# EAGLE board Main (EAGLE 9.6.2)
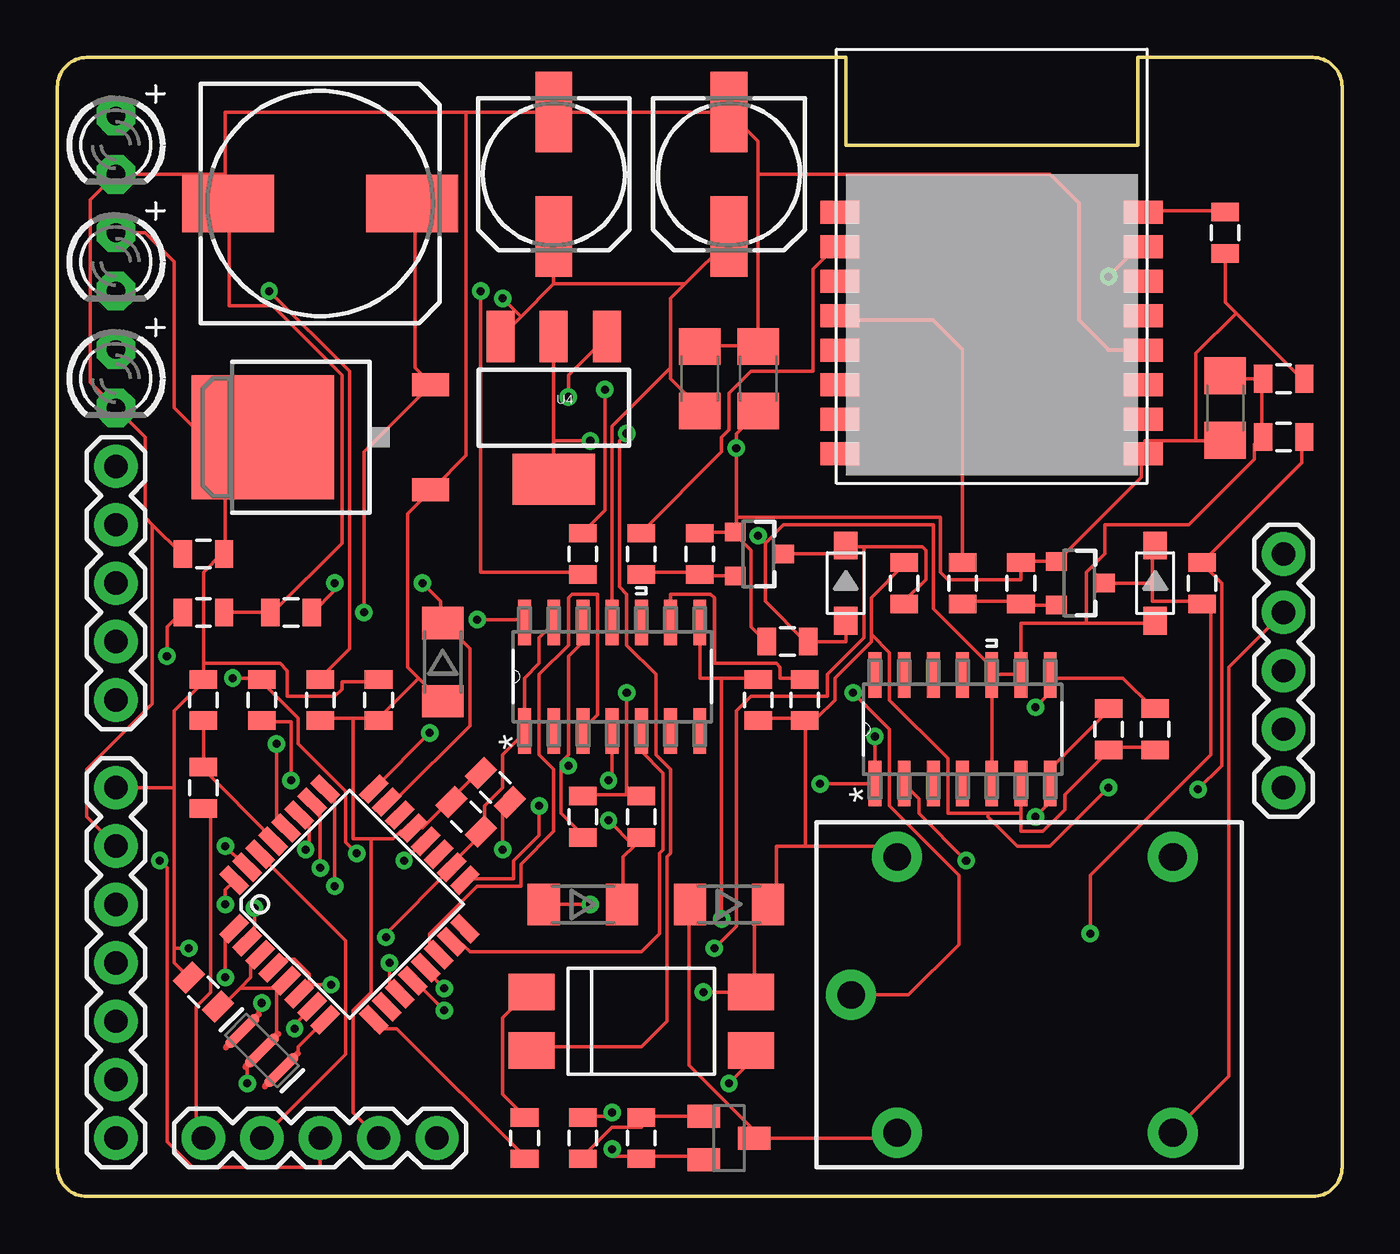
[diagram p0: board, top side]
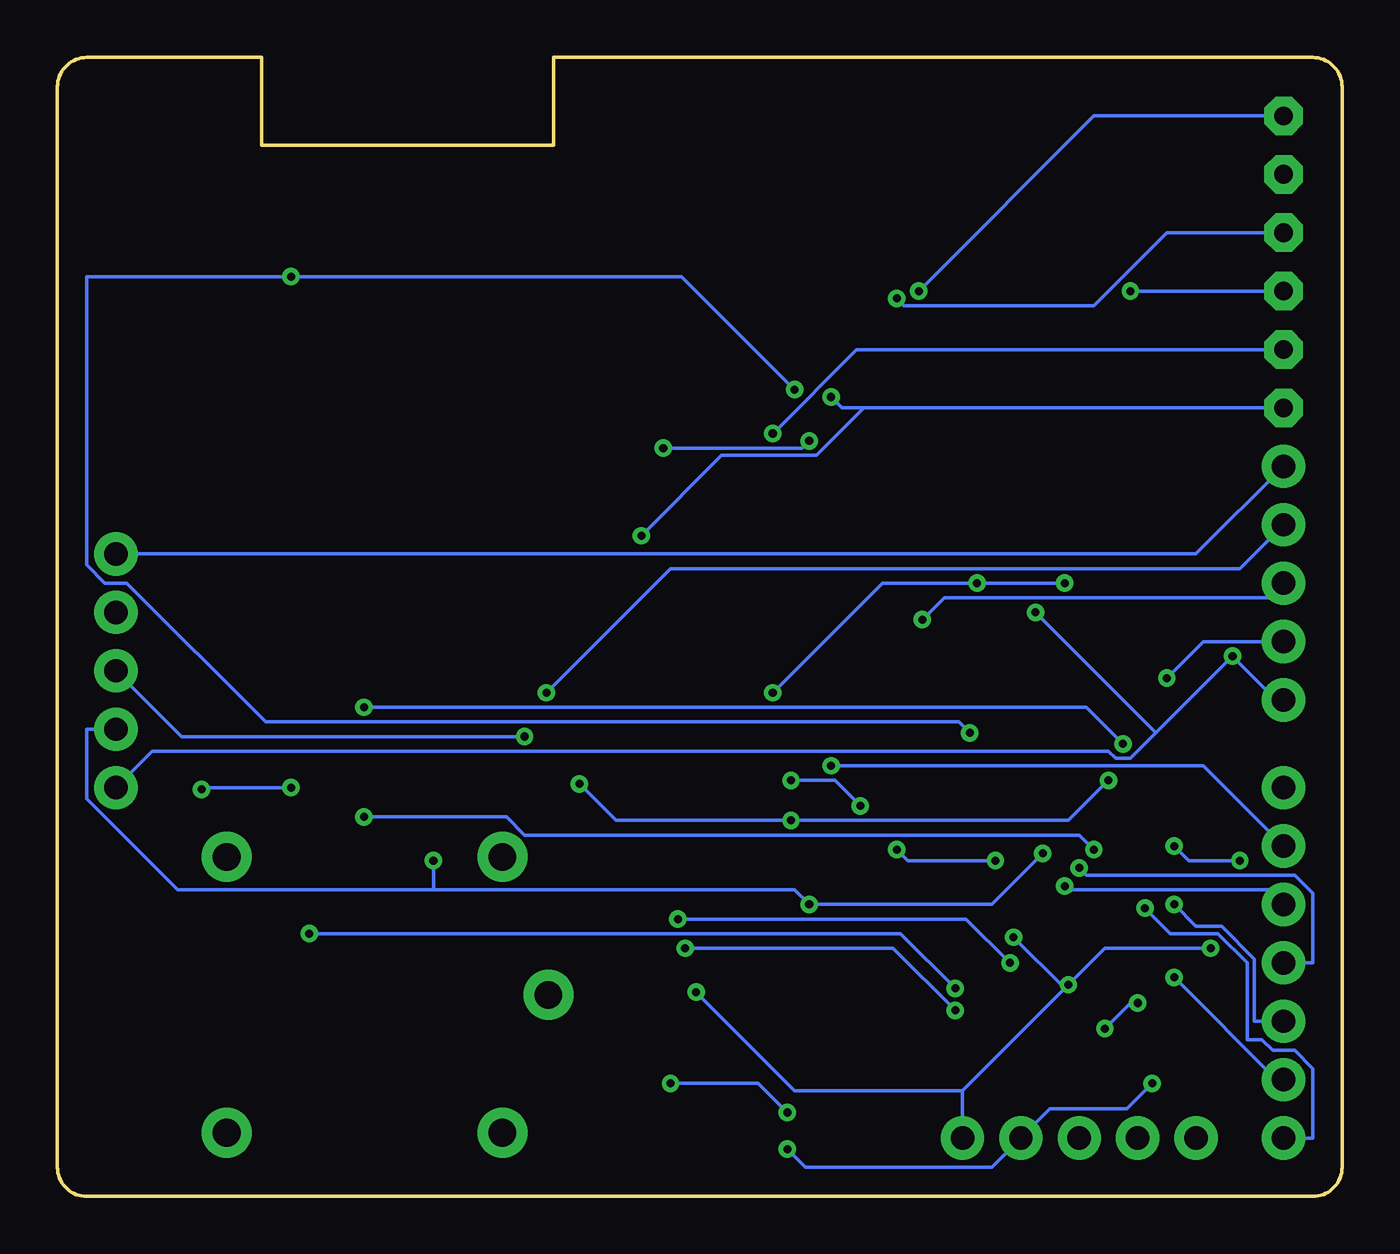
[diagram p1: board, bottom side, seen from below]

Size 55.88 x 49.53 mm. Coordinates in mm from the lower left corner, seen from the top.
Outline: 0,1.27 0,48.26 arc-90 1.27,49.53 34.29,49.53 34.29,45.72 46.99,45.72 46.99,49.53 54.61,49.53 arc-90 55.88,48.26 55.88,1.27 arc-90 54.61,0 1.27,0 arc-90 0,1.27
Copper layers (1*16): Top 0.035mm / dielectric 1.5mm / Bottom 0.035mm
Design rules "default": minimum track width 6mil, minimum drill 0.35mm, track to track 6mil, track to pad 6mil, pad to pad 6mil, via to via 6mil, smd to smd 6mil, copper to edge 40mil, drill to drill 6mil, minimum pad ring 10mil, minimum via ring 8mil, stop-mask expansion 4mil, vias tented up to drill 0mil, thermal gap 10mil
Net classes: 1 power: width 0.203 mm

## Footprints (pad centres in the part's own frame; a part is rotated, then mirrored left to right if it is on the bottom)
0805 = smd 0.8 x 1.2: 1 -0.9,0; 2 0.9,0
C1206 = smd 1.6 x 1.8: 1 -1.4,0; 2 1.4,0
153CLV-1010 = smd 4 x 2.5: + 4,0; - -4,0
153CLV-0605 = smd 3.5 x 1.6: + 2.7,0; - -2.7,0
SOD123-2.7X1.6 = smd 1.2 x 1.02: 1 -1.635,0; 2 1.635,0
SOD80 = smd 1.4 x 1.8: 1 -1.7,0; 2 1.7,0
1X05 = drill 1.016 pad 1.88: 1 0,0; 2 2.54,0; 3 5.08,0; 4 7.62,0; 5 10.16,0
TQFP32-08 = smd 1.27 x 0.559: 1 -4.293,2.8; 2 -4.293,2; 3 -4.293,1.2; 4 -4.293,0.4; 5 -4.293,-0.4; 6 -4.293,-1.2; 7 -4.293,-2; 8 -4.293,-2.8; 17 4.293,-2.8; 18 4.293,-2; 19 4.293,-1.2; 20 4.293,-0.4; 21 4.293,0.4; 22 4.293,1.2; 23 4.293,2; 24 4.293,2.8 | smd 0.559 x 1.27: 9 -2.8,-4.293; 10 -2,-4.293; 11 -1.2,-4.293; 12 -0.4,-4.293; 13 0.4,-4.293; 14 1.2,-4.293; 15 2,-4.293; 16 2.8,-4.293; 25 2.8,4.293; 26 2,4.293; 27 1.2,4.293; 28 0.4,4.293; 29 -0.4,4.293; 30 -1.2,4.293; 31 -2,4.293; 32 -2.8,4.293
TO252 = smd 1 x 1.6: 1 -2.28,-4.8; 2 2.28,-4.8 | smd 5.4 x 6.2: TAB 0,2.5
1X07 = drill 1.016 pad 1.88: 1 0,0; 2 2.54,0; 3 5.08,0; 4 7.62,0; 5 10.16,0; 6 12.7,0; 7 15.24,0
LED3MM = drill 0.813 pad 1.676 octagon: A -1.27,0; K 1.27,0
DIL4-SMD = smd 1.6 x 2: 1 -1.27,-4.77; 2 1.27,-4.77; 3 1.27,4.77; 4 -1.27,4.77
SOT23-3 = smd 0.8 x 0.9: 1 -0.95,-1; 2 0.95,-1; 3 0,1.1
SOT23-BEC = smd 1 x 1.4: B -0.95,-1.1; C 0,1.1; E 0.95,-1.1
SOIC127P600X175-14N = smd 1.981 x 0.559: 1 -2.362,3.81; 2 -2.362,2.54; 3 -2.362,1.27; 4 -2.362,0; 5 -2.362,-1.27; 6 -2.362,-2.54; 7 -2.362,-3.81; 8 2.362,-3.81; 9 2.362,-2.54; 10 2.362,-1.27; 11 2.362,0; 12 2.362,1.27; 13 2.362,2.54; 14 2.362,3.81
16P-18.5X13.5X0.8 = smd 1.7 x 1: 1 -6.6,2.15; 2 -6.6,0.65; 3 -6.6,-0.85; 4 -6.6,-2.35; 5 -6.6,-3.85; 6 -6.6,-5.35; 7 -6.6,-6.85; 8 -6.6,-8.35; 9 6.6,-8.35; 10 6.6,-6.85; 11 6.6,-5.35; 12 6.6,-3.85; 13 6.6,-2.35; 14 6.6,-0.85; 15 6.6,0.65; 16 6.6,2.15
SOT223 = smd 1.219 x 2.235: 1 -2.311,-3.099; 2 0,-3.099; 3 2.311,-3.099 | smd 3.6 x 2.2: 4 0,3.099
SRD-05VDC-SL-C = drill 1.2 pad 2.184: COIL0 -5.39,-6.12; COIL1 -5.39,5.88; SWCLOSED 6.61,-6.12; SWCOMMON -7.39,-0.12; SWOPEN 6.61,5.88
RESONATOR-SMD = smd 0.45 x 1.905: 1 -1.2,0; 2 0,0; 3 1.2,0

## Placement (x,y rotation side)
C1  0.1uF  [0805]  31.75,24.13 0 top
C2  10uF  [C1206]  50.8,34.29 90 top
C3  0.1uF  [0805]  53.34,35.56 180 top
C4  22uF  [C1206]  30.48,35.56 90 top
C5  4.7uF  [C1206]  27.94,35.56 90 top
C6  0.1uF  [0805]  17.78,16.51 315 top
C7  0.1uF  [0805]  19.05,17.78 315 top
C8  0.1uF  [0805]  6.35,17.78 90 top
C9  0.1  [0805]  53.34,33.02 180 top
C10  220/50  [153CLV-1010]  11.43,43.18 0 top
C11  100/35  [153CLV-0605]  21.59,44.45 270 top
C12  0.1uF  [0805]  6.35,25.4 0 top
C13  0.1uF  [0805]  6.35,8.89 315 top
C14  0.1uF  [0805]  6.35,27.94 180 top
C15  10uf  [153CLV-0605]  29.21,44.45 270 top
C17  0.1uF  [0805]  13.97,21.59 270 top
C18  0.1  [0805]  10.16,25.4 180 top
D1  SMF5.0A  [SOD123-2.7X1.6]  47.75,26.67 90 top
D2  SMF5.0A  [SOD123-2.7X1.6]  34.29,26.67 90 top
D3  4148  [SOD80]  16.76,23.24 270 top
D5  4148  [SOD80]  22.86,12.7 180 top
D12  4148  [SOD80]  29.21,12.7 180 top
ECU  [1X05]  2.54,21.59 90 top
IC1  MEGA8-AI  [TQFP32-08]  12.7,12.7 45 top
IC2  LM1117DTX-5.0  [TO252]  11.43,33.02 90 top
JP1  [1X07]  2.54,17.78 270 top
JP2  [1X05]  6.35,2.54 0 top
LED1  BT  [LED3MM]  2.54,45.72 270 top
LED2  PW  [LED3MM]  2.54,40.64 270 top
LED3  RY  [LED3MM]  2.54,35.56 270 top
OK1  PC817  [DIL4-SMD]  25.4,7.62 270 top
Q3  BSS138BK  [SOT23-3]  30.48,27.94 270 top
Q4  BSS138BK  [SOT23-3]  44.45,26.67 270 top
R1  10k  [0805]  27.94,27.94 90 top
R2  10k  [0805]  36.83,26.67 90 top
R3  10k  [0805]  41.91,26.67 90 top
R4  10k  [0805]  49.78,26.67 90 top
R5  1k  [0805]  25.4,27.94 270 top
R6  1k  [0805]  22.86,27.94 90 top
R7  1k  [0805]  39.37,26.67 270 top
R8  10k  [0805]  45.72,20.32 270 top
R9  10k  [0805]  6.35,21.59 90 top
R10  10k  [0805]  32.51,21.59 270 top
R11  10k  [0805]  30.48,21.59 270 top
R12  330  [0805]  20.32,2.54 90 top
R13  4.7k  [0805]  25.4,16.51 270 top
R14  1k  [0805]  11.43,21.59 270 top
R15  2.2k  [0805]  22.86,16.51 90 top
R16  1k  [0805]  50.8,41.91 90 top
R17  1k  [0805]  22.86,2.54 270 top
R18  3.9k  [0805]  25.4,2.54 90 top
R19  10k  [0805]  47.75,20.32 90 top
R20  20k  [0805]  8.89,21.59 270 top
SENSOR  [1X05]  53.34,17.78 90 top
T3  BC817  [SOT23-BEC]  29.21,2.54 270 top
U1  MCP4922-E/SL  [SOIC127P600X175-14N]  24.13,22.61 90 top
U2  HM-11  [16P-18.5X13.5X0.8]  40.64,40.64 0 top
U4  LM1117 3.3  [SOT223]  21.59,34.29 180 top
U$1  MCP3424-E/SL  [SOIC127P600X175-14N]  39.37,20.32 90 top
U$10  RELAYPTH  [SRD-05VDC-SL-C]  41.91,8.89 0 top
Y1  16MHZ  [RESONATOR-SMD]  8.89,6.35 315 top

## Library data of the parts
C1 = SparkFun-Capacitors
C2 C4 C5 C10 C11 C15 LED1-LED3 = adafruit
C3 C6-C9 C12-C14 C17 C18 R12 R17 R18 = SparkFun-Passives
D1 D2 = discrete
D3 D5 D12 = semicon-smd-ipc
ECU JP1 JP2 SENSOR = SparkFun
IC1 = atmel; MPN: ATMEGA8-16AU; OC_FARNELL: 9171371; OC_NEWARK: 73M8863
IC2 = lm1117
OK1 = optocoupler
Q3 Q4 = SparkFun-DiscreteSemi; PROD_ID: TRANS-00830
R1-R11 R13-R16 R19 R20 = SparkFun-Resistors
T3 = transistor
U1 = Microchip_By_element14_Batch_1; MPN: MCP4922-E/SL; OC_FARNELL: 1332114; OC_NEWARK: 08J8748; PACKAGE: SOIC14; SUPPLIER: Microchip
U2 = template
U4 = SparkFun-PowerIC; PROD_ID: VREG-08170
U$1 = Microchip_By_element14_Batch_1; MPN: MCP3424-E/SL; OC_FARNELL: 1630424; OC_NEWARK: 54M4871; PACKAGE: SOIC-14; SUPPLIER: Microchip
U$10 = SRD-05VDC-SL-C
Y1 = SparkFun-FreqCtrl; PROD_ID: XTAL-08900

## Nets
3.3V: C1.1 C2.1 C3.1 C4.1 Q3.1 Q4.1 R1.2 R3.2 R16.1 U2.9 U4.2 U4.4
12V: C10.+ C12.1 ECU.1 IC2.2 SENSOR.1
A0: C18.1 D3.1 IC1.23 R13.1 R15.2
A1: IC1.24 R6.2 U2.15
A2: IC1.25 JP1.3
A3: IC1.26 JP1.4
CS: IC1.14 U1.3
D2: IC1.32 JP1.5
D3: IC1.1 JP1.6
D4: IC1.2 JP1.7
D5: IC1.9 R12.1
D6: IC1.10
D7: IC1.11 R11.1 U1.8
D8: D2.2 IC1.12 Q3.3 R2.1
D9: D1.2 IC1.13 Q4.3 R4.1
GND: C1.2 C2.2 C3.2 C4.2 C5.2 C6.1 C7.1 C9.2 C10.- C11.- C12.2 C13.2 C14.2 C15.- C17.2 C18.2 D1.1 D2.1 D3.2 IC1.3 IC1.5 IC1.21 IC2.1 JP1.2 JP2.4 LED1.K LED3.K R14.2 R15.1 R18.1 T3.E U1.12 U2.12 U4.1 U$1.5 U$1.9 U$1.10 Y1.2
GNDAIR: D5.2 ECU.2 R20.1 SENSOR.2 U$1.2
GNDTEMP: ECU.5 SENSOR.5
MISO: IC1.16
MOSI: IC1.15 U1.5
N$1: LED1.A R6.1
N$2: R16.2 U2.16
N$3: R5.1 U2.2
N$5: IC1.8 Y1.3
N$6: R7.1 U2.4
N$7: IC1.7 Y1.1
N$8: C7.2 IC1.20
N$10: C8.1 JP2.1
N$12: LED2.K R14.1
N$16: R10.1 U1.9
N$20: OK1.3 R17.1
N$21: R17.2 R18.2 T3.B
N$22: D12.2 T3.C U$10.COIL0
N$23: OK1.1 R12.2
N$31: LED3.A OK1.2
OUTSIGN: ECU.3 U1.14
RST: C8.2 IC1.29 R9.1
RXD: IC1.30 JP2.2
RXD1: Q4.2 R3.1 R7.2
SCK: IC1.17 U1.4
SCL: IC1.28 R19.2 U$1.8
SDA: IC1.27 R8.1 U$1.7
SENS_IN: D5.1 R13.2 R20.2 SENSOR.3 U$1.1
SENSORINTEMP: SENSOR.4 U$10.SWCLOSED
SENSOROUTTEMP: ECU.4 U$10.SWCOMMON
TXD: IC1.31 JP2.3
TXD1: Q3.2 R1.1 R5.2
VCC: C5.1 C6.2 C9.1 C11.+ C13.1 C14.1 C15.+ C17.1 D12.1 IC1.4 IC1.6 IC1.18 IC2.TAB JP1.1 JP2.5 LED2.A OK1.4 R2.2 R4.2 R8.2 R9.2 R10.2 R11.2 R19.1 U1.1 U1.11 U1.13 U4.3 U$1.6 U$10.COIL1

## Tracks (layer width: path | path; a pad name or v marks a point on that pad's centre or on a via)
3.3V  (via drill 0.35)
  Top 0.152: U4.4 21.59,32.86 | 21.59,32.86 U4.2 | Q3.1 29.37,28.89 27.94,28.89 R1.2 | C1.1 30.8,24.13 30.16,24.77 30.16,28.1 29.53,28.73 Q3.1 | 29.53,29.53 29.53,28.89 Q3.1 | 29.53,29.53 v29.53,32.54 29.53,33.18 30.48,34.13 C4.1 | v23.18,32.86 21.59,32.86 | 51.28,38.42 50.8,38.89 R16.1 | 51.28,38.42 54.13,35.56 C3.1 | 49.53,32.86 47.31,32.86 47.31,32.38 U2.9 47.15,32.23 47.15,31.27 43.5,27.62 Q4.1 43.34,27.62 41.91,27.62 R3.2 41.91,26.83 38.73,26.83 38.42,27.15 38.42,29.53 38.1,29.53 | 49.53,32.86 50.8,32.86 C2.1 | 51.28,38.42 49.53,36.67 49.53,32.86 | 38.1,29.53 29.53,29.53 | 38.1,29.53
  Bottom 0.152: v23.18,32.86 23.5,32.54 v29.53,32.54
12V  (via drill 0.35)
  Top 0.152: C10.+ 15.56,43.18 15.56,36.04 16.19,35.4 IC2.2 16.19,35.24 13.34,32.38 v13.34,25.4 | v4.76,23.5 4.76,24.77 5.4,25.4 C12.1
  Bottom 0.152: ECU.1 2.86,21.59 v4.76,23.5 8.1,20.16 | SENSOR.1 51.75,19.37 10.16,19.37 9.84,19.05 9.21,19.05 8.1,20.16 | 8.1,20.16 v13.34,25.4
A0  (via drill 0.35)
  Top 0.152: 24.77,17.46 25.4,17.46 R13.1 | 24.77,17.46 22.86,17.46 R15.2 | v12.06,26.67 12.06,26.35 11.11,25.4 C18.1 | v15.88,26.67 16.67,25.88 16.67,25.08 D3.1 16.83,24.92 17.94,23.81 17.94,20.48 14.76,17.3 14.45,17.3 IC1.23 | v24.77,21.91 24.77,17.46
  Bottom 0.152: v12.06,26.67 v15.88,26.67 20,26.67 v24.77,21.91
A1  (via drill 0.35)
  Top 0.152: v23.81,35.08 23.81,29.84 22.86,28.89 R6.2 | v45.72,40.01 47.15,41.43 U2.15 | v16.19,20.16 13.81,17.78 IC1.24
  Bottom 0.152: v23.81,35.08 28.73,40.01 v45.72,40.01 54.61,40.01 54.61,27.46 53.82,26.67 52.86,26.67 46.83,20.64 16.67,20.64 v16.19,20.16
A2  (via drill 0.35)
  Top 0.152: v12.06,13.49 12.06,17.3 11.75,17.62 IC1.25
  Bottom 0.152: v12.06,13.49 11.91,13.34 3.17,13.34 JP1.3
A3  (via drill 0.35)
  Top 0.152: v11.43,14.29 11.43,16.83 11.11,17.14 IC1.26
  Bottom 0.152: v11.43,14.29 11.11,13.97 2.06,13.97 1.27,13.18 1.27,10.16 JP1.4
CS
  Top 0.152: IC1.14 16.51,10.64 16.19,10.95 16.19,11.43 18.26,13.49 20.16,13.49 20.16,14.45 21.59,15.88 21.59,18.57 20.95,19.21 20.95,22.7 22.23,23.97 22.23,26.04 22.38,26.19 23.5,26.19 23.5,20.95 22.86,20.32 U1.3
D2  (via drill 0.35)
  Top 0.152: v7.3,12.7 7.3,13.34 7.62,13.65 IC1.32
  Bottom 0.152: v7.3,12.7 6.35,11.75 5.24,11.75 3.81,10.32 3.81,7.62 JP1.5
D3  (via drill 0.35)
  Top 0.152: v7.3,9.53 7.3,11.27 7.62,11.59 IC1.1
  Bottom 0.152: v7.3,9.53 2.86,5.08 JP1.6
D4  (via drill 0.35)
  Top 0.152: v8.57,12.54 8.57,11.43 8.26,11.11 IC1.2
  Bottom 0.152: v8.57,12.54 7.46,11.43 5.4,11.43 4.13,10.16 4.13,6.83 3.49,6.83 3.02,6.35 2.06,6.35 1.27,5.56 1.27,2.54 JP1.7
D5
  Top 0.152: R12.1 20.32,1.75 14.76,7.3 13.81,7.3 13.81,7.62 IC1.9
D7  (via drill 0.35)
  Top 0.152: 28.89,22.54 27.94,22.54 U1.8 | 28.89,22.54 30.48,22.54 R11.1 | v14.45,10.16 14.45,9.21 14.76,8.89 IC1.11 | 28.89,22.54 v28.89,12.06
  Bottom 0.152: v14.45,10.16 16.35,12.06 v28.89,12.06
D8  (via drill 0.35)
  Top 0.152: Q3.3 34.29,27.94 34.29,28.26 | 34.29,28.26 35.08,28.26 | 35.08,28.26 37.62,28.26 37.78,28.1 37.78,26.83 36.83,25.88 R2.1 | 34.29,28.26 D2.2 | v16.83,8.1 15.56,9.37 IC1.12 | v28.57,10.79 29.53,11.75 29.53,21.11 30.16,21.75 33.5,21.75 33.5,22.7 35.08,24.29 35.08,28.26
  Bottom 0.152: v16.83,8.1 19.53,10.79 v28.57,10.79
D9  (via drill 0.35)
  Top 0.152: 47.62,26.67 Q4.3 | 47.62,26.67 47.62,28.26 D1.2 | 47.62,26.67 47.62,25.88 49.69,25.88 R4.1 50.16,25.39 50.16,19.21 44.93,13.97 v44.93,11.43 | v16.83,9.05 16.03,9.84 IC1.13
  Bottom 0.152: v16.83,9.05 19.21,11.43 v44.93,11.43
GND  (via drill 0.35)
  Top 0.152: C7.1 18.26,18.41 17.14,17.3 C6.1 16.99,17.14 15.88,16.03 15.56,16.03 IC1.21 15.4,15.88 14.92,15.88 14.61,15.56 13.65,15.56 | 13.97,20.8 12.86,20.8 | 12.86,20.8 11.43,20.8 R14.2 | 15.72,22.54 16.67,21.59 D3.2 | 15.72,22.54 15.24,23.02 15.24,29.69 16.19,30.64 IC2.1 16.35,30.8 17.78,32.23 17.78,47.15 | 15.72,22.54 13.97,20.8 | 13.97,20.8 C17.2 | 13.65,15.56 12.86,15.56 12.86,20.8 | 9.53,9.05 9.84,9.37 IC1.5 9.53,9.05 | 9.53,9.05 9.53,7.14 Y1.2 8.26,5.71 v8.26,4.92 8.26,5.56 8.17,5.63 | 7.94,9.05 8.41,9.53 8.41,10.16 8.73,10.48 IC1.3 | 7.94,9.05 7.14,8.26 C13.2 | 7.94,9.05 9.53,9.05 | 25.4,1.75 28.1,1.75 T3.E | 25.4,1.75 24.13,1.75 v24.13,2.06 | 25.4,1.75 R18.1 | 13.65,15.56 13.65,8.89 12.86,8.1 12.86,3.65 JP2.4 | 30.48,36.99 27.94,36.99 C5.2 | 47.15,36.83 U2.12 45.72,36.79 45.72,36.83 44.45,38.1 44.45,43.18 43.18,44.45 30.48,44.45 | 30.48,36.99 C4.2 | C11.- C15.- 30.48,45.88 30.48,44.45 | D2.1 34.29,24.13 C1.2 32.54,24.13 30.8,25.88 30.8,28.42 | U$1.5 U$1.10 40.64,22.7 | 30.8,28.42 31.59,29.21 38.1,29.21 38.1,25.56 40.64,23.02 40.64,22.7 | 52.39,35.56 52.39,33.02 | 52.39,35.56 50.8,35.56 C2.2 | 52.39,35.56 C3.2 | 44.77,24.92 41.91,24.92 41.91,22.7 | 44.77,24.92 47.62,24.92 D1.1 | 52.39,33.02 52.07,32.7 52.07,32.07 49.21,29.21 45.56,29.21 45.56,27.94 44.77,27.15 44.77,24.92 | 52.39,33.02 C9.2 | 41.91,22.7 40.64,22.7 | 41.91,22.7 U$1.9 | C12.2 C18.2 9.37,25.4 12.38,28.42 12.38,35.72 9.37,38.73 7.46,38.73 7.46,43.18 C10.- 7.3,43.18 7.3,44.45 | 7.3,44.45 LED1.K 1.43,43.34 1.43,35.4 LED3.K 3.81,33.02 3.81,29.53 4.13,29.21 | 21.91,18.73 21.91,18.89 22.23,19.21 22.23,23.5 22.86,24.13 U1.12
  Top 0.152: 21.91,18.73 21.91,16.67 22.86,15.72 R15.1 | 4.13,29.21 5.4,27.94 C14.2 | v22.23,34.77 22.23,35.72 23.81,37.31 U4.1 | JP1.2 1.27,16.51 1.27,18.57 4.13,21.43 4.13,29.21 | v22.23,18.73 21.91,18.73 | v30.48,28.73 30.8,28.42 | 17.78,47.15 7.3,47.15 7.3,44.45 | 17.78,47.15 C11.- | C11.- | 30.48,44.45 30.48,36.99
  Bottom 0.152: v24.13,2.06 23.34,1.27 15.24,1.27 JP2.4 12.7,3.81 9.37,3.81 v8.26,4.92 | v22.23,34.77 21.75,34.29 20.8,34.29 | LED3.K 20.8,34.29 | v22.23,18.73 6.03,18.73 JP1.2 | v30.48,28.73 26.99,32.23 22.86,32.23 20.8,34.29
GNDAIR  (via drill 0.35)
  Top 0.152: v7.62,22.54 8.89,22.54 R20.1 8.89,22.38 10.48,20.8 10.48,19.68 12.54,17.62 12.54,15.4 v13.02,14.92 | v23.18,12.7 D5.2 | v39.53,14.61 37.47,16.67 37.47,17.3 36.83,17.94 U$1.2
  Bottom 0.152: v7.62,22.54 6.03,24.13 ECU.2 | 39.53,13.34 50.64,13.34 54.61,17.3 54.61,20.32 SENSOR.2 | 39.53,13.34 23.81,13.34 v23.18,12.7 15.24,12.7 v13.02,14.92 | 39.53,13.34 v39.53,14.61
GNDTEMP
  Bottom 0.152: ECU.5 6.35,27.94 SENSOR.5
MOSI
  Top 0.152: U1.5 25.4,19.37 26.35,18.41 26.35,15.08 26.19,14.92 26.19,11.43 25.4,10.64 17.94,10.64 17.62,10.95 17.3,10.95 IC1.15
N$1  (via drill 0.35)
  Top 0.152: v18.41,39.37 18.41,27.15 22.86,27.15 R6.1
  Bottom 0.152: v18.41,39.37 10.79,46.99 LED1.A
N$2
  Top 0.152: R16.2 50.8,42.86 47.31,42.86 U2.16
N$3
  Top 0.152: R5.1 25.4,28.89 28.89,32.38 28.89,33.02 29.21,33.34 29.21,34.92 30.16,35.88 32.86,35.88 32.86,40.32 33.97,41.43 U2.2
N$5
  Top 0.152: IC1.8 11.59,7.62 10.48,6.51 10.48,6.19 Y1.3
N$6
  Top 0.152: U2.4 34.23,38.1 38.1,38.1 39.37,36.83 R7.1
N$7  (via drill 0.35)
  Top 0.152: v10.32,7.3 10.32,7.46 10.95,8.1 IC1.7 | v8.89,8.41 8.73,8.26 8.73,7.94 Y1.1
  Bottom 0.152: v10.32,7.3 9.21,8.41 v8.89,8.41
N$8  (via drill 0.35)
  Top 0.152: v19.37,15.08 19.37,16.67 19.68,16.99 C7.2 | v15.08,14.61 15.88,15.4 IC1.20
  Bottom 0.152: v19.37,15.08 18.89,14.61 v15.08,14.61
N$10
  Top 0.152: JP2.1 6.03,2.86 6.03,8.26 6.67,8.89 6.67,16.51 6.35,16.83 C8.1
N$12  (via drill 0.35)
  Top 0.152: v9.21,39.37 12.7,35.88 12.7,23.81 11.43,22.54 R14.1
  Bottom 0.152: LED2.K v9.21,39.37
N$16
  Top 0.152: U1.9 26.67,26.19 28.42,26.19 28.57,26.04 28.57,23.18 31.27,23.18 31.43,23.02 31.43,22.54 32.38,22.54 R10.1
N$20  (via drill 0.35)
  Top 0.152: v24.13,3.65 24.13,3.49 22.86,3.49 R17.1 | v29.21,4.92 30.16,5.87 OK1.3
  Bottom 0.152: v24.13,3.65 25.4,4.92 v29.21,4.92
N$21
  Top 0.152: R17.2 22.86,1.75 24.13,3.02 25.4,3.02 R18.2 25.4,3.49 T3.B
N$22
  Top 0.152: U$10.COIL0 36.51,2.7 36.51,2.54 T3.C 30.16,2.54 30.16,3.02 27.46,5.71 27.46,12.7 D12.2
N$23
  Top 0.152: R12.2 20.32,3.49 19.37,4.45 19.37,7.78 20.48,8.89 OK1.1
N$31  (via drill 0.35)
  Top 0.152: v24.77,33.18 24.45,32.86 24.45,26.51 24.77,26.19 24.77,23.97 26.04,22.7 26.04,19.21 26.67,18.57 26.67,14.92 26.51,14.76 26.51,7.62 25.4,6.51 20.8,6.51 OK1.2
  Bottom 0.152: v24.77,33.18 21.11,36.83 LED3.A
OUTSIGN  (via drill 0.35)
  Top 0.152: v18.26,25.08 20.32,25.08 U1.14
  Bottom 0.152: v18.26,25.08 17.3,26.04 3.17,26.04 ECU.3
RST
  Top 0.152: R9.1 C8.2 6.35,18.57 9.37,15.56 IC1.29
RXD
  Top 0.152: JP2.2 12.54,6.19 12.54,11.11 8.89,14.76 IC1.30
RXD1
  Top 0.152: Q4.2 43.34,25.72 41.91,25.72 R3.1 41.91,25.88 39.37,25.88 R7.2
SCK  (via drill 0.35)
  Top 0.152: v20.95,16.99 20.95,15.72 19.84,14.61 19.84,13.81 17.78,13.81 IC1.17 | v23.97,18.1 24.13,18.26 U1.4
  Bottom 0.152: v20.95,16.99 22.07,18.1 v23.97,18.1
SCL  (via drill 0.35)
  Top 0.152: 43.18,22.54 46.35,22.54 47.62,21.27 R19.2 | v9.53,19.68 9.53,16.35 9.84,16.03 IC1.28 | v42.55,21.27 43.18,21.91 43.18,22.54 | 43.18,22.54 U$1.8
  Bottom 0.152: v9.53,19.68 11.11,21.27 v42.55,21.27
SDA  (via drill 0.35)
  Top 0.152: R8.1 45.72,21.11 43.18,18.57 U$1.7 43.18,17.14 v42.55,16.51 | v10.79,15.08 10.95,15.24 10.95,16.19 10.64,16.51 IC1.27
  Bottom 0.152: v10.79,15.08 11.43,15.72 35.56,15.72 36.35,16.51 v42.55,16.51
SENS_IN  (via drill 0.35)
  Top 0.152: 25.08,15.24 24.61,14.76 24.61,12.7 D5.1 | 25.08,15.24 25.4,15.56 R13.2 25.08,15.24 | v10.16,18.1 10.16,20.64 8.89,20.64 R20.2 | 25.08,15.24 v23.97,16.35 | v33.18,17.94 35.56,17.94 U$1.1 v35.56,20
  Bottom 0.152: v10.16,18.1 11.91,16.35 v23.97,16.35 31.59,16.35 v33.18,17.94 | SENSOR.3 50.48,20 v35.56,20
SENSORINTEMP
  Top 0.152: SENSOR.4 50.96,23.02 50.96,5.24 48.58,2.86 U$10.SWCLOSED
SENSOROUTTEMP  (via drill 0.35)
  Top 0.152: v34.61,21.91 36.2,20.32 36.2,16.99 39.21,13.97 39.21,10.95 37.03,8.77 U$10.SWCOMMON
  Bottom 0.152: ECU.4 4.45,27.3 29.21,27.3 v34.61,21.91
TXD  (via drill 0.35)
  Top 0.152: v7.3,15.24 8.1,14.45 IC1.31 | v4.45,14.61 4.76,14.29 4.76,2.38 5.87,1.27 11.43,1.27 JP2.3
  Bottom 0.152: v7.3,15.24 6.67,14.61 v4.45,14.61
TXD1
  Top 0.152: Q3.2 29.37,26.99 27.94,26.99 R1.1 27.94,27.15 25.4,27.15 R5.2
VCC  (via drill 0.35)
  Top 0.152: 32.54,15.24 36.51,15.24 U$10.COIL1 | 32.54,15.24 31.27,15.24 31.27,13.06 D12.1 30.8,12.7 30.32,12.22 30.32,8.89 OK1.4 v28.1,8.89 | C9.1 54.13,33.02 54.13,31.91 49.85,27.62 R4.2 49.85,27.46 50.64,26.67 50.64,18.73 v49.61,17.7 | R19.1 47.62,19.53 45.72,19.53 R8.2 45.72,19.37 43.81,17.46 43.81,16.83 42.86,15.88 41.91,15.88 41.91,16.67 | U$1.6 41.91,16.67 | R11.2 30.48,20.8 32.38,20.8 R10.2 | 35.4,24.45 35.4,24.13 33.81,22.54 33.81,21.59 33.02,20.8 32.54,20.8 R10.2 | 35.4,24.45 35.4,26.04 36.83,27.46 R2.2 | 40.48,16.67 41.91,16.67 | 35.4,24.45 36.2,23.65 36.2,21.59 38.73,19.05 38.73,16.67 40.48,16.67 | 40.48,16.67 40.48,16.51 41.75,15.24 43.18,15.24 v45.72,17.78 | 32.54,15.24 32.54,20.64 R10.2 | U1.13 21.59,24.92 20.95,24.29 20.95,23.18 20.32,22.54 U1.1 20.32,20.16 19.37,19.21 19.37,17.78 18.57,16.99 18.57,15.88 C6.2 18.41,15.72 17.3,14.61 17.3,14.45 IC1.18 17.14,14.29 14.29,11.43 v14.29,11.27 | 10.95,9.21 10.64,8.89 IC1.6 10.95,9.21 | 10.95,9.21 10.95,9.68 10.32,10.32 9.53,10.32 9.53,10 IC1.4 | v11.91,9.21 10.95,9.21 | 21.59,39.69 20.16,38.26 | 20.16,38.26 19.37,37.47 U4.3 | C11.+ 21.59,39.69 | 26.67,36.04 26.67,39.05 27.3,39.69 | 26.67,36.04 26.67,35.56 27.94,34.29 C5.1 | 27.3,39.69 29.21,41.59 C15.+ | U1.11 24.13,33.5 26.67,36.04 | 27.3,39.69 21.59,39.69 | 8.89,33.02 8.89,35.56 | 5.08,10.79 5.08,17.78 | 5.08,10.79 5.08,10.16 5.56,9.68 C13.1 | 6.35,23.18 R9.2 6.35,22.38 5.08,21.11 5.08,17.78 | 6.35,23.18 6.35,27.15 7.14,27.94 C14.1 7.3,27.94 7.3,31.43 8.89,33.02 | 6.35,23.18 9.68,23.18 10,22.86 10,21.75 12.06,21.75 12.38,22.07 12.38,22.38 13.97,22.38 C17.1 | 8.89,33.02 IC2.TAB 6.35,33.02 5.08,34.29 5.08,40.64 3.81,41.91 LED2.A
  Top 0.152: v19.37,39.05 20.16,38.26 | 5.08,10.79 v5.71,10.79 | JP1.1 5.08,17.78
  Bottom 0.152: 16.51,4.6 12.06,9.05 | JP2.5 16.51,4.6 | 12.06,9.05 v14.29,11.27 | 12.06,9.05 v11.91,9.21 10.32,10.79 v5.71,10.79 | v19.37,39.05 19.05,38.73 10.79,38.73 7.62,41.91 LED2.A | v28.1,8.89 23.81,4.6 16.51,4.6 | v45.72,17.78 49.53,17.78 v49.61,17.7